# Allegro board RPM_Counter.brd
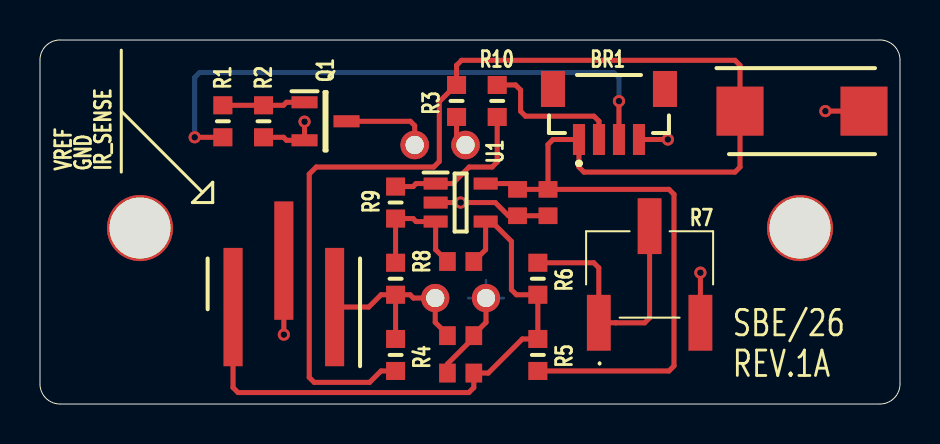
[diagram p0: board, top side]
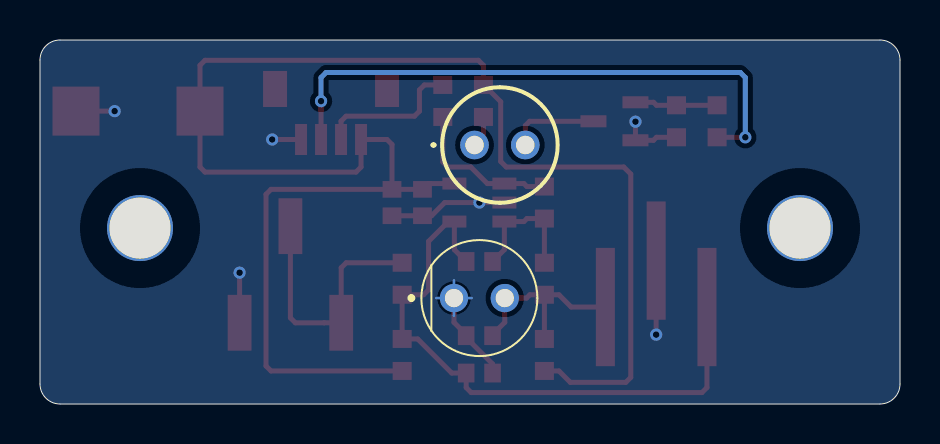
[diagram p1: board, bottom side, seen from below]

Outline 43 x 18.2 mm; copper layers: TOP, BOTTOM. Coordinates in mm from the lower left corner of the outline.
Outline path: 0,17.2 0,1 arc(0.29,0.29) 1,0 42,0 arc(42.71,0.29) 43,1 43,17.2 arc(42.71,17.91) 42,18.2 1,18.2 arc(0.29,17.91) 0,17.2

## Design rules (mm)
constraint set DEFAULT: min track width 0.127

## Placement (name value [footprint] x y rotation side)
BR1  MSV4  [23671974_4P]  28.45 14.64 0 top
BR2  MSV3  [HUSRSP3W64P254_762X254X838P]  12.19 6.01 180 top
C1  1n  [CAPC1608X90N]  21.03 3.42 0 top
C2  1n  [CAPC1608X90N]  21.03 1.55 180 top
C3  100p  [CAPC1608X90N]  21.03 7.13 0 top
C4  100n  [CAPC1608X90N]  23.88 10.07 270 top
C5  1u  [CAPC1608X90N]  25.4 10.07 270 top
C6  10u  [CAPPM7343X200N]  38.1 14.64 0 top
D1  QED123  [QED123A4R0]  21.27 12.95 0 bottom
NOREF  -  [unnamed]  5 8.8 0 top
NOREF#2  -  [unnamed]  38 8.8 0 top
Q1  Si2300DS  [SOT95P237X102-3N]  14.28 14.14 0 top
Q2  -  [QSD123]  22.3 5.3 180 bottom
R1  100  [RESC1608X55N]  9.14 14.14 90 top
R2  100k  [RESC1608X55N]  11.18 14.14 270 top
R3  3.83k  [RESC1608X55N]  20.83 15.15 270 top
R4  187k  [RESC1608X55N]  17.78 2.45 90 top
R5  47k  [RESC1608X55N]  24.89 2.45 90 top
R6  33k  [RESC1608X55N]  24.89 6.26 90 top
R7  25k  [3269W1200LF]  30.48 6.48 180 top
R8  47k  [RESC1608X55N]  17.78 6.26 90 top
R9  1M  [RESC1608X55N]  17.78 10.07 90 top
R10  1k  [RESC1608X55N]  22.86 15.15 90 top
U1  TLV3201  [SOT95P280X145-5N]  21.03 10.07 0 top

## Library data of the parts
BR1 = MSV4
BR2 = MSV3
C1-C5 = C
C6 = C-POL
D1 = LED
Q1 = N MOSFET
Q2 = PHOTO NPN
R1-R6 R8-R10 = R
R7 = POT A
U1 = COMPARATOR

## Footprints (pads in the part's own frame, mm; a bottom-side part is the same pattern mirrored in y, then rotated)
3269W1200LF
  rect 1.19x2.79 smd: 1(2.54,2.415) 2(0,-2.415) 3(-2.54,2.415)
23671974_4P
  rect 0.6x1.55 smd: 1(-1.5,-1.419) 2(-0.5,-1.419) 3(0.5,-1.419) 4(1.5,-1.419)
CAPC1608X90N
  rect 0.83x0.94 smd: 1(-0.66,0) 2(0.66,0)
CAPPM7343X200N
  rect 2.35x2.45 smd: 1(-3.1,0) 2(3.1,0)
HUSRSP3W64P254_762X254X838P
  rect 0.952x5.915 smd: 1(-2.54,1.161) 2(0,-1.161) 3(2.54,1.161)
QED123A4R0
  round 1.431 hole 0.92: 1(0,0) 2(-2.54,0)
QSD123
  round 1.416 hole 0.91: 1(0,0) 2(2.54,0)
RESC1608X55N
  rect 0.9x0.95 smd: 1(-0.8,0) 2(0.8,0)
SOT95P237X102-3N
  rect 1.3x0.6 smd: 1(-1.05,0.95) 2(-1.05,-0.95) 3(1.05,0)
SOT95P280X145-5N
  rect 1.2x0.6 smd: 1(-1.25,0.95) 2(-1.25,0) 3(-1.25,-0.95) 4(1.25,-0.95) 5(1.25,0.95)
unnamed
  round 3.302 hole 3.048: (0,0)

## Nets
GND: BR1.4 BR2.2 C1.2 C2.2 C4.2 C5.2 C6.2 Q1.2(S) Q2.1(2) R2.2 R7.3 U1.2
VCC: BR1.1 C4.1 C5.1 C6.1(2) R3.1 R4.1 R5.1 U1.5(VCC)
VIN: C3.1 R8.2 R9.1 U1.3
ENABLE: BR1.3 R1.1
IR_SENSE: BR2.1 C1.1 Q2.2 R4.2 R8.1
OUT: BR1.2 R10.2
VREF: BR2.3 C2.1 C3.2 R5.2 R6.1 U1.4
N30070: D1.1 R3.2
N30214: D1.2 Q1.3
N30248: R6.2 R7.1 R7.2(3)
N30258: R9.2 R10.1 U1.1
N30334: Q1.1 R1.2 R2.1

## Via types
v1: diameter 0.61, hole 0.33, TOP to BOTTOM, 8 vias

## Routing (per net, layer and track width the routed paths; a pad name or vN(x,y) marks a point on that pad's centre or on a via; arc(x,y) is an arc through that point)
GND: length 26.6
  TOP w0.25: R7.3 v1(33.02,6.57) ; C5.2 C4.2 23.42,9.41 22.76,10.07 v1(21.03,10.07) U1.2 ; v1(13.23,14.12) 13.23,13.19 12.32,13.19 12.18,13.34 R2.2 ; BR1.4 v1(31.39,13.22) ; BR2.2 v1(12.19,3.47) ; C2.2 20.37,2 21.69,3.32 C1.2 21.69,3.47 22.3,4.08 Q2.1 ; C6.2 v1(39.27,14.64)
  BOTTOM w0.127: Q2.1 22.3,6.18 ; Q2.1 23.19,5.3 ; Q2.1 22.3,4.41 ; Q2.1 21.42,5.3
VCC: length 84.9
  TOP w0.25: C5.1 C4.1 23.59,11.02 U1.5 ; C5.1 25.4,12.97 25.65,13.22 BR1.1 26.95,11.85 27.2,11.6 34.75,11.6 35,11.85 C6.1 35,16.93 34.75,17.18 21.08,17.18 20.83,16.93 R3.1 20.8,15.95 19.96,15.11 19.96,12.13 19.69,11.85 13.81,11.85 13.46,11.5 13.46,1.33 13.71,1.08 16.48,1.08 17.05,1.65 R4.1 ; C5.1 31.45,10.73 31.7,10.48 31.7,1.9 31.45,1.65 R5.1
VIN: length 6.5
  TOP w0.25: C3.1 19.78,7.72 U1.3 18.8,9.12 18.65,9.27 R9.1 R8.2
ENABLE: length 28.9
  TOP w0.25: R1.1 v1(7.73,13.34) ; BR1.3 v1(28.95,15.14)
  BOTTOM w0.25: v1(28.95,15.14) 28.95,16.32 28.7,16.57 7.98,16.57 7.73,16.32 v1(7.73,13.34)
IR_SENSE: length 9.8
  TOP w0.25: R8.1 17.05,5.46 16.44,4.85 BR2.1 ; R8.1 R4.2 ; R8.1 18.51,5.46 18.67,5.3 Q2.2 19.76,4.08 20.37,3.47 C1.1
  TOP w0.5: Q2.2 19.67,5.21
OUT: length 7.4
  TOP w0.25: R10.2 23.78,15.95 24.03,15.7 24.03,14.64 24.28,14.39 27.7,14.39 27.95,14.14 BR1.2
VREF: length 30.9
  TOP w0.25: C3.2 22.28,7.72 U1.4 22.58,9.12 23.57,8.13 23.57,5.71 23.82,5.46 R6.1 R5.2 24.12,3.25 22.41,1.55 C2.1 21.69,0.82 21.44,0.57 9.9,0.57 9.65,0.82 BR2.3
N30070: length 1.6
  TOP w0.25: R3.2 20.83,13.4 D1.1
N30214: length 4.5
  TOP w0.25: Q1.3 18.52,14.14 18.73,13.92 D1.2
N30248: length 13.2
  TOP w0.25: R6.2 27.69,7.06 27.94,6.81 R7.1 28.79,4.06 28.79,4.06 30.23,4.06 30.48,4.31 R7.2 30.48,8.93
N30258: length 7.8
  TOP w0.25: R9.2 18.65,10.87 18.8,11.02 U1.1 20.63,11.02 21.46,11.85 22.61,11.85 22.86,12.1 R10.1
N30334: length 4.1
  TOP w0.25: 13.23,15.09 12.32,15.09 12.18,14.94 R2.1 R1.2

## Copper pours and planes (outline as drawn; the poured copper is in the pictures)
GND on BOTTOM: 0,1 0.29,0.29 1,0 42,0 42.71,0.29 43,1 43,17.2 42.71,17.91 42,18.2 1,18.2 0.29,17.91 0,17.2
Net_1 on TOP (solid shape): 26.25,14.85 25.05,14.85 25.05,16.65 26.25,16.65
Net_2 on TOP (solid shape): 31.85,14.85 30.65,14.85 30.65,16.65 31.85,16.65

## Text on the board
Ref Des/Silkscreen Top: VREF | GND | IR_SENSE | SBE/26 | REV.1A
